# Altium PCB Driver Morpheus PONTE H.PcbDoc
Units mm, origin at the board's own origin, x right, y up, seen from the top; angles counter-clockwise.
Board outline 48.5 x 25 mm, 2 copper layers (Top Layer, Bottom Layer); 40 components, 20 nets, 111 pads, 8 vias.
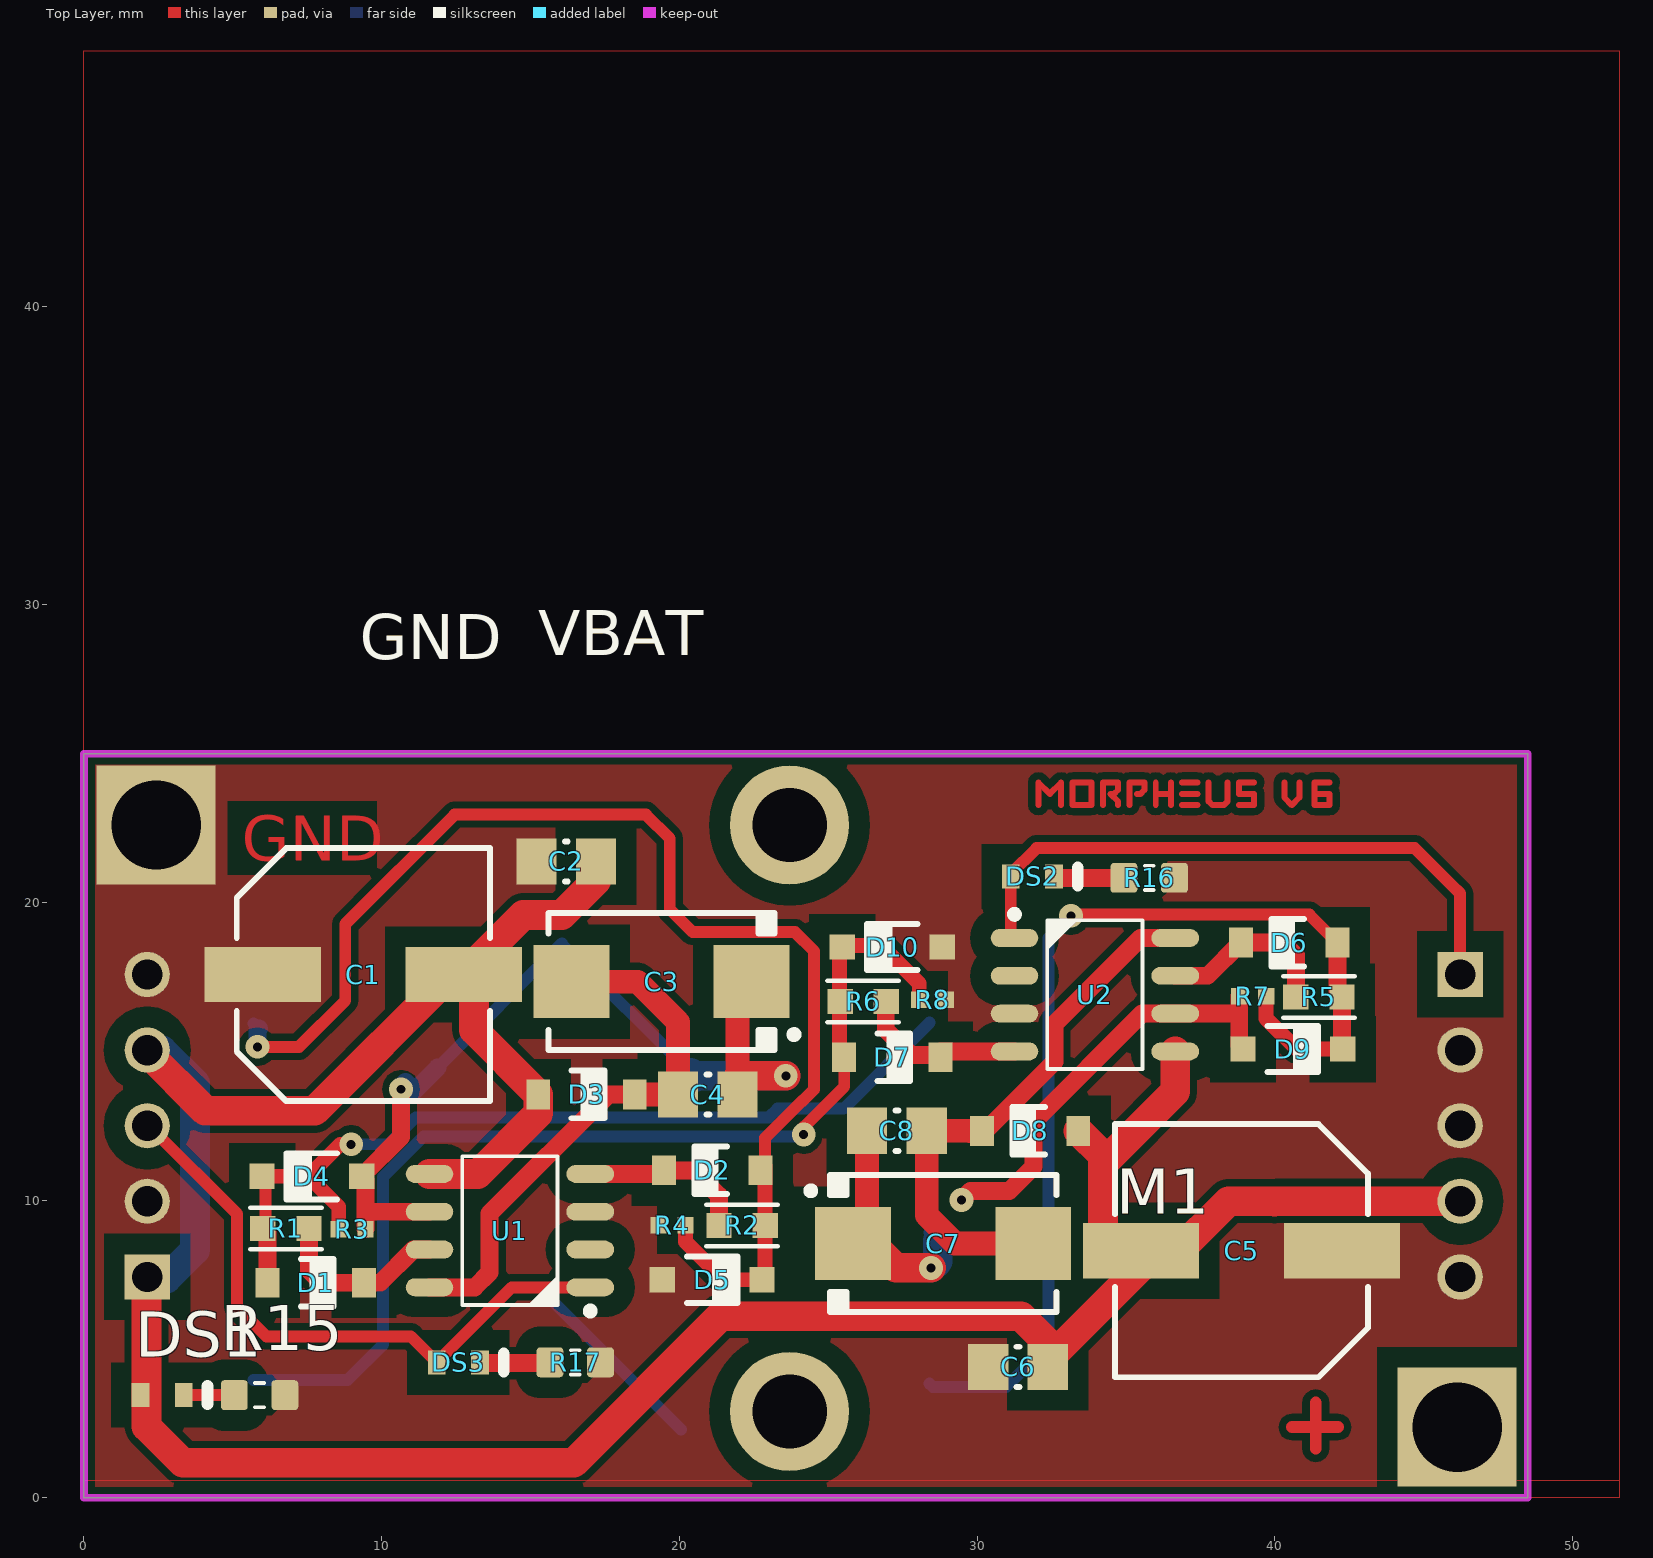
[diagram p0: Top Layer view]
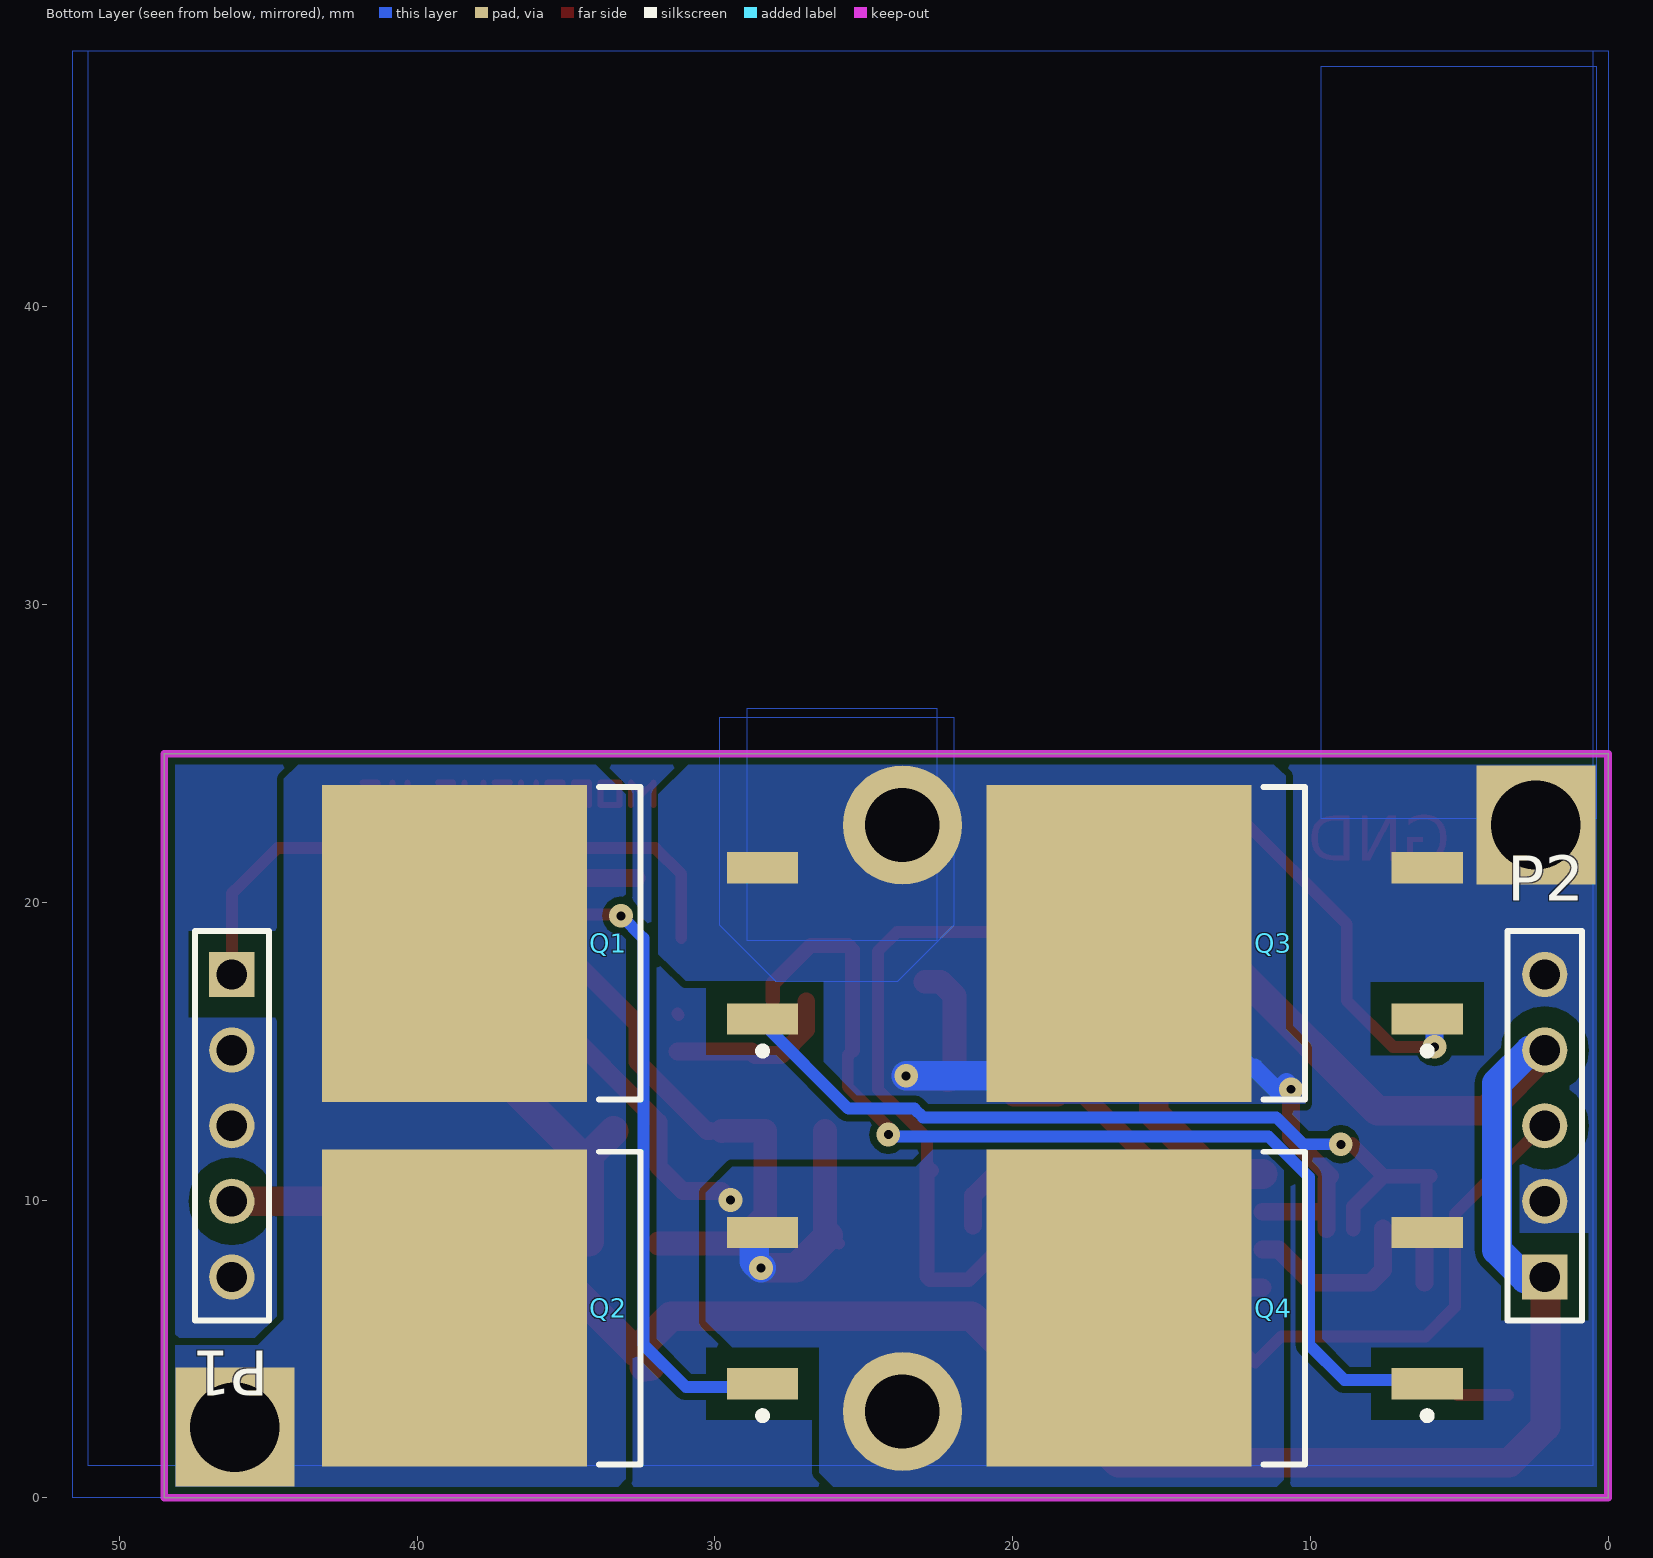
[diagram p1: Bottom Layer view, seen from below]

## Layer stack, top to bottom
Top Solder: solder mask 0.0102, Solder Resist, Dk 3.5
Top Layer: signal copper 0.0356
Dielectric 1: dielectric 0.32, FR-4, Dk 4.8
Bottom Layer: signal copper 0.0356
Bottom Solder: solder mask 0.0102, Solder Resist, Dk 3.5

## Board outline
0,0 0,25 48.5,25 48.5,0

## Design rules (kind name [scope] priority, off if disabled: settings)
BoardOutlineClearance [All] p1: gap=0 ignorepadtopadclearanceinfootprint=FALSE
Clearance Clearance_1 [IsPad vs InPolygon] p1: gap=0.7 ignorepadtopadclearanceinfootprint=FALSE
Clearance [All] p2: gap=0.24 ignorepadtopadclearanceinfootprint=FALSE except(0: Arc-Hole Track-Hole SMDPad-Hole THPad-Hole Via-Hole Fill-Hole Poly-Hole Region-Hole Text-Hole; 0.7: Track-Region)
ComponentClearance [All vs InComponentClass('IGNORA')] p1: gap=-1 collisioncheckmode=3 verticalgap=-1 showdistances=FALSE
ComponentClearance ComponentClearance_1 [All] p2: gap=0.254 collisioncheckmode=3 verticalgap=0.254 showdistances=FALSE
PlaneConnect [All] p1: planeconnectstyle=Direct reliefexpansion=0.508 reliefentries=4 reliefconductorwidth=0.254 reliefairgap=0.254
PolygonConnect [All] p1: connectstyle=Direct reliefconductorwidth=0.254 reliefentries=4 polygonreliefangle="90 Angle" airgapwidth=0.254
RoutingVias [All] p1: holewidth=0.3 width=0.4 viastyle="Through Hole" minholewidth=0.3 minwidth=0.4 maxholewidth=0.4 maxwidth=0.6
SMDNeckDown [InNet('No Net')] p1: percent=70.000
SolderMaskExpansion [All] p1: expansion=0.102
Width [All] p1: maxlimit=15 minlimit=0.01 preferedwidth=0.4
28 further rules are at their usual default settings.

## Components (designator, comment, footprint, x,y, rotation, side; value= is the part's Value field where it differs from the comment)
C1 "100uF 25v" CAPAE9083X70M 9.381,17.575 r0 top
C2 "CAP 100nF 25V 0805(2012)" CAPC0805(2012)145_M#1 16.2,21.375 r0 top value=100nF
C3 "Cap_10u_35v" "CAP POL 2917/7343" 19.401,17.337 r180 top
C4 "CAP 100nF 25V 0805(2012)" CAPC0805(2012)145_M#2 196.597,-60.497 r180 top value=100nF
C5 "100uF 25v" CAPAE9083X70M 38.881,8.3 r180 top
C6 "CAP 100nF 25V 0805(2012)" CAPC0805(2012)145_M#1 31.375,4.4 r0 top value=100nF
C7 "Cap_10u_35v" "CAP POL 2917/7343" 28.861,8.538 r0 top
C8 "CAP 100nF 25V 0805(2012)" CAPC0805(2012)145_M#2 -148.335,86.372 r0 top value=100nF
D1 "1N4148W" JSCJ-SOD-123-2_V 7.781,7.225 r0 top
D2 "1N4148W" JSCJ-SOD-123-2_V 21.106,11 r180 top
D3 "1N4148W" JSCJ-SOD-123-2_V 16.881,13.55 r0 top
D4 "MMSZ5246B-E3-08" VISH-SOD-123-2_V 7.656,10.8 r180 top
D5 "MMSZ5246B-E3-08" VISH-SOD-123-2_V 21.1,7.325 r0 top
D6 "1N4148W" JSCJ-SOD-123-2_V 40.481,18.65 r180 top
D7 "1N4148W" JSCJ-SOD-123-2_V 27.15,14.8 r0 top
D8 "1N4148W" JSCJ-SOD-123-2_V 31.78,12.325 r180 top
D9 "MMSZ5246B-E3-08" VISH-SOD-123-2_V 40.606,15.075 r0 top
D10 "MMSZ5246B-E3-08" VISH-SOD-123-2_V 27.15,18.5 r180 top
DS1 "TLMB1100-GS08" VISH-TLMX1100-2_V 2.625,3.45 r0 top
DS2 "TLMB1100-GS08" VISH-TLMX1100-2_V 31.856,20.875 r0 top
DS3 "TLMB1100-GS08" VISH-TLMX1100-2_V 12.575,4.55 r0 top
P1 "MTLW-105-05-G-S-190" SMTC-MTLW-105-05-X-S-190 46.225,17.58 r270 bottom
P2 "MTLW-105-05-G-S-190" SMTC-MTLW-105-05-X-S-190 2.125,7.42 r90 bottom
Q1 "IRF3205S" D2PAK_N 35.2,18.625 r0 bottom
Q2 "IRF3205S" D2PAK_N 35.2,6.375 r0 bottom
Q3 "IRF3205S" D2PAK_N 12.875,18.625 r0 bottom
Q4 "IRF3205S" D2PAK_N 12.875,6.375 r0 bottom
R1 "22" SMD-0603-RES 6.781,9.05 r270 top
R2 "22" SMD-0603-RES 22.106,9.15 r90 top
R3 "RC0402JR-071KL" RES-0402 9.006,9.025 r180 top value=1K
R4 "RC0402JR-071KL" RES-0402 19.756,9.15 r0 top value=1K
R5 "22" SMD-0603-RES 41.481,16.825 r270 top
R6 "22" SMD-0603-RES 26.175,16.675 r90 top
R7 "RC0402JR-071KL" RES-0402 39.256,16.85 r0 top value=1K
R8 "RC0402JR-071KL" RES-0402 28.506,16.725 r180 top value=1K
R15 "Thick Film" RESC1608X55N 5.9,3.45 r0 top value=1k
R16 "Thick Film" RESC1608X55N 35.781,20.825 r0 top value=220R
R17 "Thick Film" RESC1608X55N 16.5,4.55 r0 top value=220R
U1 "IR2184" SOIC127P600X175-8AN 14.306,8.975 r180 top
U2 "IR2184" SOIC127P600X175-8AN 33.956,16.9 r0 top

## Footprints (in the part's own frame and the unit in brackets; to place one, negate y for a bottom-side part, rotate by r counter-clockwise, add the part's x,y. Pads: shape width x height; smd on the part's side, far side on the other; paste and mask are expansions set on the pad)
"CAP POL 2917/7343" [mm] "Molded Capacitor, 2-Leads, Body 7.30x4.30mm, IPC Medium Density"
  rect 2.55x2.45 smd: 1(-3.025,0) 2(3.025,0)
  silkscreen extent -4.58,-2.3 3.8,2.3, body extent -3.65,-2.15 3.65,2.15, height 4.1
CAPAE9083X70M [mm] "Aluminum Electrolytic Capacitor, Body 8,30x8,30x7,00mm, IPC Low Density"
  rect 3.9x1.85 smd: 1(-3.375,0) 2(3.375,0)
  silkscreen extent -4.25,-4.25 4.25,4.25, body extent -4.25,-4.25 4.25,4.25, height 7
CAPC0805(2012)145_M#1 [mm] "Chip Capacitor, Body 2.0x1.2mm, Height 1.45mm, IPC Low Density"
  rect 1.35x1.55 smd: 1(-1,0) 2(1,0)
  silkscreen extent -0.05,-0.67 0.05,0.67, body extent -1.1,-0.72 1.1,0.72, height 1.45
CAPC0805(2012)145_M#2 [mm] "Chip Capacitor, Body 2.0x1.2mm, Height 1.45mm, IPC Low Density"
  rect 1.35x1.55 smd: 1(174.641,-74.041) 2(176.641,-74.041)
  silkscreen extent 175.59,-74.72 175.69,-73.37, body extent 174.54,-74.77 176.74,-73.32, height 1.45
D2PAK_N [mm] "D-PAK/TO-263-3; 3 Leads (1 Cropped); Body 14.7 (inc. leads) x 10.2 mm (LxW max)"
  rect 2.4x1.05 smd: 1(-6.8,2.54) 3(-6.8,-2.54)
  rect 8.9x10.65 smd: 2(3.55,0)
  silkscreen extent -6.92,-5.25 -1.3,5.25, body extent -2.7,-5.28 6.3,5.28, height 4.69
JSCJ-SOD-123-2_V [mm] "SMD, 2-Leads, Body 2.7x1.6mm, Height 1.25mm"
  rect 0.8x1 smd: 1(-1.62,0) 2(1.62,0)
  silkscreen extent -0.5,-0.8 0.6,0.8, body extent -1.35,-0.8 1.35,0.8, height 1.25
RES-0402 [mm]
  rect 0.55x0.55 smd: 1(-0.45,0) 2(0.45,0)
  body extent -0.53,-0.27 0.53,0.28, height 0.4
RESC1608X55N [mm] "Chip Resistor, Body 1.6x0.8mm, EIA 0603, IPC Medium Density"
  round 0.254 on Mech15: 0(0,0)
  rrect25% 0.9x1 smd: 1(-0.85,0) 2(0.85,0)
  Top Layer pour cut-out: -0.6,0.5 -0.4,0.7 0.4,0.7 0.6,0.5 0.6,-0.5 0.4,-0.7 -0.4,-0.7 -0.6,-0.5
  silkscreen extent -0.15,-0.41 0.15,0.41, body extent -0.87,-0.47 0.88,0.48, height 0.54
SMD-0603-RES [mm]
  rect 0.85x0.85 smd: 1(0,0.775) 2(0,-0.775)
  silkscreen extent -0.7,-1.2 0.7,1.2, body extent -0.4,-0.85 0.4,0.85, height 0.56
SMTC-MTLW-105-05-X-S-190 [mm] "Terminal Assembly, 1x5 Pins, Vertical, 2.54mm Pitch, Male"
  rect 1.52x1.52 hole 1.02: 1(0,0)
  round 1.52 hole 1.02: 2(2.54,0) 3(5.08,0) 4(7.62,0) 5(10.16,0)
  silkscreen extent -1.46,-1.24 11.62,1.24, body extent -1.27,-1.24 11.43,1.24, height 6.35
SOIC127P600X175-8AN [mm] "SOIC, 8-Leads, Body 4.9x3.9mm, Pitch 1.27mm, IPC Medium Density"
  round 1 on Mech15: 0(0,0)
  oval 1.6x0.6 smd: 1(-2.7,1.905) 2(-2.7,0.635) 3(-2.7,-0.635) 4(-2.7,-1.905) 5(2.7,-1.905) 6(2.7,-0.635) 7(2.7,0.635) 8(2.7,1.905)
  silkscreen extent -2.83,-2.5 1.6,2.82, body extent -3,-2.45 3,2.45, height 1.75
VISH-SOD-123-2_V [mm] "SMD, 2-Leads, Body 2.7x1.55mm, Height 1.35mm"
  rect 0.85x0.85 smd: 1(-1.675,0) 2(1.675,0)
  silkscreen extent -0.85,-0.78 0.85,0.78, body extent -1.35,-0.77 1.35,0.77, height 1.35
VISH-TLMX1100-2_V [mm] "SMD, 2-Leads, Body 1.6x0.8mm"
  rect 0.6x0.8 smd: 1(-0.725,0) 2(0.725,0)
  silkscreen extent 1.53,-0.3 1.53,0.3, body extent -0.8,-0.4 0.8,0.4, height 0.65

## Part data
C1: library part Cap_10u_35v
C2 C4 C6 C8: library part CMP-1036-04408-1, "CAP 100nF 25V ±5% 0805 (2012 Metric) Thickness 1.45mm SMD", Case-EIA=0805, Case-Metric=2012, Rated Voltage="25 V", Tolerance=±5%, Max Thickness="1.45 mm", Technology=SMT
C5: library part Cap_100u_25v, "Cap Tântalo"
D1 D2 D3 D6 D7 D8: library part CMP-0914-00001-1, "Fast Switching Diode, 75 V, 150 mA, 2-Pin 2.7 x 1.6 x 1.25 mm SMD, Tape and Reel", Manufacturer="Changjiang Electronics", ComponentLink1Description="Manufacturer URL", ComponentLink1URL=http://www.cj-elec.com/, ComponentLink2Description=Datasheet, ComponentLink2URL=http://www.cj-elec.com/txUpfile/20121613352740313.pdf, ComponentLink3Description="Package Specification", ComponentLink3URL=http://www.cj-elec.com/txUpfile/201412112231195145.pdf, DatasheetVersion="Rev. A", IO (mA)=150, IR (uA)=1, Mounting Technology="Surface Mount", PackageDescription="2-Pin SMD, Body 2.7 x 1.6 mm, Height 1.25 mm", PackageReference=SOD-123-2, PackageVersion="Rev. A", Packing="Tape and Reel", PartNumber=1N4148W, PD (mW)=350, Trr (ns)=4, TSTG (degC)="-55 to 150", VF (V)=1.25, VR (V)=75
D4 D5 D9 D10: library part CMP-0931-00032-1, "Small Signal Zener Diode, 16 V +/- 5%, -55 to 155 degC, 2-Pin SOD-123, RoHS, Tape and Reel", Manufacturer="Vishay Semiconductor", Operating Temperature="-55 to 150 degC", Power Dissipation (mW)=500, Test Current (IZT1) (mA)=7.8, Tolerance="+/- 5%", Zener Voltage (NOM.) (V)=16, ComponentLink1Description="Manufacturer URL", ComponentLink1URL=http://www.vishay.com/, ComponentLink2Description=Datasheet, ComponentLink2URL=http://www.vishay.com/docs/85774/mmsz5225.pdf, ComponentLink3Description="Package Specification", ComponentLink3URL=http://www.vishay.com/docs/85774/mmsz5225.pdf, DatasheetVersion="Rev. 1.9", Int. Construction=Single, Mounting Technology="Surface Mount", PackageDescription="2-Pin SMD, Body 2.7 x 1.55 mm, Height 1.35 mm", PackageReference=SOD-123-2, PackageVersion="Rev. 1.9", Packing="Tape and Reel", PartNumber=MMSZ5246B-E3-08, RoHS=TRUE, Zener Impedance (IZT1) (Max.) (Ohm)=17
DS1 DS2 DS3: library part CMP-1666-00028-1, "Blue LED, 10 mA, 3.9 V, -40 to 100 degC, 2-Pin SMD (0603), RoHS, Tape and Reel", Capacitance="10 nF", Case\Package=Radial, Max Operating Temperature="125 degC", Min Operating Temperature="-55 degC", Package Quantity=500, Tolerance=10%, Type (Capacitors)=X7R, Voltage Rating="100 V", ComponentLink1Description="Manufacturer URL", ComponentLink1URL=http://www.vishay.com/, ComponentLink2Description=Datasheet, ComponentLink2URL=http://download.siliconexpert.com/pdfs/2016/8/7/12/43/26/667/vsh_/manual/379263299541529tlmb1100.pdf, DatasheetVersion="Rev. 2.7, 03/2016", Height="2.54 mm", Lead Pitch="2.54 mm", Length="5.33 mm", Mount="Through Hole", PackageDescription="2-Pin Surface Mount Device, Body 1.6 x 0.8 mm", PackageReference=0603, Packaging=Bulk, Pins=2, Radiation Hardening=No, REACH SVHC="No SVHC", RoHSCompliant=true, Width="3.81 mm"
P1 P2: library part CMP-1024-00076-1, Manufacturer=Samtec, Temperature Range="-55 to 125 degC", ComponentLink1Description="Manufacturer URL", ComponentLink1URL=http://www.samtec.com, ComponentLink2Description=Datasheet, ComponentLink2URL=http://www.samtec.com/documents/webfiles/pdf/MTLW_TH.PDF, ComponentLink3Description="Package Specification", ComponentLink3URL=http://www.samtec.com/documents/webfiles/cpdf/MTLW-1XX-XX-XX-X-XXX-XX-XX-MKT1.pdf, DatasheetVersion=F-214, Mounting Technology=Through-hole, Orientation=Vertical, PackageDescription="Low Profile Terminal Assembly", PackageReference=MTLW-105-05-X-S-190, PackageVersion="T, 6/1991", PartNumber=MTLW-105-05-G-S-190, Pitch="2.54 mm", RoHS=True
Q1 Q2 Q3 Q4: "HEXFET Power MOSFET", ComponentLink1Description="Manufacturer Link", ComponentLink1URL=http://www.irf.com/, ComponentLink2Description=Datasheet, ComponentLink2URL=http://www.irf.com/product-info/datasheets/data/irf3205s.pdf, DatasheetVersion=Aug-1997, LatestRevisionDate=20-Nov-2009, LatestRevisionNote="IPC-7351 Footprint Added.", PackageDescription="3-Pin Transistor Outline Package 2.54 mm Pitch, 15.1 mm Lead Span", PackageReference=D2PAK, Published=8-Jun-2000, Publisher="Altium Limited"
R1 R2 R5 R6: library part ERJ-3EKF22R0V, "RES SMD 22 OHM 1% 1/10W 0603", Digi-Key Part Number=P22.0HCT-ND, Manufacturer="Panasonic Electronic Components", Operating Temperature="-55°C ~ 155°C", Package / Case="0603 (1608 Metric)", Power (Watts)="0.1W, 1/10W", Supplier Device Package=0603, Temperature Coefficient=±100ppm/°C, Tolerance=±1%, @ qty=1500, Composition="Thick Film", Datasheets=http://industrial.panasonic.com/www-cgi/jvcr13pz.cgi?E+PZ+3+AOA0002+ERJ3EKF22R0V+7+WW, Factory Stock=0, Failure Rate=-, Features="Automotive AEC-Q200", Height - Seated (Max)="0.022\" (0.55mm)", Image=//media.digikey.com/Photos/Panasonic%20Photos/MFG_ERJ-P6W%20Series.jpg, Minimum Quantity=1, Number of Terminations=2, Packaging="Cut Tape (CT)", Part Number=ERJ-3EKF22R0V, Part Status=Active, Quantity Available=100321, Series=ERJ, Size / Dimension="0.063\" L x 0.031\" W (1.60mm x 0.80mm)", Unit Price (USD)=0.00379
R3 R4 R7 R8: library part "RES 1K 0402", "RES SMD 1K OHM 5% 1/16W 0402"
R15 R16 R17: library part RES_220R_0603_5%, "Resistor SMD chip 220 Ohm 0.1W 5% 0603", Manufacturer 1=Yageo, Manufacturer 2="Panasonic Electronic Components", Manufacturer 3="Stackpole Electronics Inc", Manufacturer 4="Rohm Semiconductor", Manufacturer 5="Royal Ohm", Manufacturer Part Number 1=RC0603JR-07220RL, Manufacturer Part Number 2=ERJ-3GEYJ221V, Manufacturer Part Number 3=RMCF0603JT220R, Manufacturer Part Number 4=MCR03ERTJ221, Manufacturer Part Number 5=0603WAJ0221, Package / Case="0603 (1608 metric)", Ratings="1/10 W", Supplier Part Number 1=311-220GRCT-ND, Tolerance=±5%, ComponentLink1Description=http://www.yageo.com/documents/recent/PYu-RC0603_51_RoHS_L_4.pdf, ComponentLink1URL=http://www.yageo.com/documents/recent/PYu-RC0603_51_RoHS_L_4.pdf, ComponentLink2Description=http://industrial.panasonic.com/www-cgi/jvcr13pz.cgi?E+PZ+3+AOA0001+ERJ3GEYJ221V+7+WW, ComponentLink2URL=http://industrial.panasonic.com/www-cgi/jvcr13pz.cgi?E+PZ+3+AOA0001+ERJ3GEYJ221V+7+WW, ComponentLink3Description=http://www.seielect.com/Catalog/SEI-RMCF_RMCP.pdf, ComponentLink3URL=http://www.seielect.com/Catalog/SEI-RMCF_RMCP.pdf, ComponentLink4Description=http://rohmfs.rohm.com/en/products/databook/datasheet/passive/resistor/chip_resistor/mcr_g.pdf, ComponentLink4URL=http://rohmfs.rohm.com/en/products/databook/datasheet/passive/resistor/chip_resistor/mcr_g.pdf, Material="Thick Film", RoHS 1="RoHS Compliant", RoHS 2="RoHS Compliant", RoHS 3="RoHS Compliant", RoHS 4="RoHS Compliant", SCDType=spec, Supplier 1=Digi-Key, Supplier 2=Digi-Key, Supplier 3=Digi-Key, Supplier 4=Digi-Key, Supplier Part Number 2=P220GCT-ND, Supplier Part Number 3=RMCF0603JT220RCT-ND, Supplier Part Number 4=RHM220CGCT-ND
U1 U2: PSpiceTemplate="X^@REFDES %VCC %IN %SD %COM %VB %HO %VS %LO @MODEL PARAMS:  ?CDELAY|CDELAY=@CDELAY||CDELAY=50N| ?RDELAY|RDELAY=@RDELAY||RDELAY=50| ?T1|T1=@T1||T1=-40| ?T2|T2=@T2||T2=25| ?T3|T3=@T3||T3=125| ?V1|V1=@V1||V1=10| ?V2|V2=@V2||V2=15| ?V3|V3=@V3||V3=20| ?TOFFT1|TOFFT1=@TOFFT1||TOFFT1=270N| ?TOFFT2|TOFFT2=@TOFFT2||TOFFT2=270N| ?TOFFT3|TOFFT3=@TOFFT3||TOFFT3=270N| ?TOFFV1|TOFFV1=@TOFFV1||TOFFV1=270N| ?TOFFV2|TOFFV2=@TOFFV2||TOFFV2=270N| ?TOFFV3|TOFFV3=@TOFFV3||TOFFV3=270N| ?TONT1|TONT1=@TONT1||TONT1=210N| ?TONT2|TONT2=@TONT2||TONT2=210N| ?TONT3|TONT3=@TONT3||TONT3=210N| ?TONV1|TONV1=@TONV1||TONV1=210N| ?TONV2|TONV2=@TONV2||TONV2=210N| ?TONV3|TONV3=@TONV3||TONV3=210N|", CDELAY=50N, RDELAY=50, T1=-40, T2=25, T3=125, TOFFT1=270N, TOFFT2=270N, TOFFT3=270N, TOFFV1=270N, TOFFV2=270N, TOFFV3=270N, TONT1=210N, TONT2=210N, TONT3=210N, TONV1=210N, TONV2=210N, TONV3=210N, V1=10, V2=15, V3=20

## Free pads (board coordinates)
  rect 4x4 hole 3: 8(2.425,22.6) 8(46.125,2.375)
  round 4 hole 2.5: 8(23.7,2.9) 8(23.7,22.6)

## Via types
v1: diameter 0.8, hole 0.3, Top Layer to Bottom Layer, 8 vias

## Nets (pads, with @x,y where several pads share a name; then routed paths per layer and width w, separated by ;. In a path a pad name is that pad's centre, name@x,y a point inside that pad or via, vN(x,y) a via of type N, cw(c..) or ccw(c..) an arc to the next point about the centre after c; other vN are vias at no path point)
+12V: C1.2 C2.2 C5.2 C6.2 D3.1 D8.1 DS1.1 P1.4 P2.1 P2.4 U1.5 U2.5 | length 105.4
  Top Layer w0.4: C2.2@17.2,20.725 C2.2 ; C5.2 35.656,8.15 C5.2@36.625,8.15
  Top Layer w1: P2.1@1.9,7.42 2.1,7.22 2.1,2.4 3.325,1.175 16.45,1.175 21.375,6.1 31.475,6.1 32.663,4.912 35.506,7.756 C5.2 ; P2.4@2.08,14.995 4.075,13 7.75,13 12.325,17.575 C1.2 ; U1.5 13.23,10.88 15.261,12.911 D3.1 13.1,15.711 13.1,17.067 12.674,17.493 C1.2 ; C1.2@14.05,17.575 C1.2 ; C2.2@17.2,20.725 16.05,19.575 14.756,19.575 C1.2 ; C6.2@32.175,4.425 32.262,4.512 C6.2 ; D8.1 34.225,11.5 34.225,11.22 ; C5.2@34.225,8.6 34.225,11.22 ; C5.2@36.625,8.15 38.44,9.965 39.999,9.965 ; U2.5 36.656,13.651 34.225,11.22 ; 39.989,9.955 39.999,9.965 ; P1.4 46.22,9.965 39.999,9.965
  Bottom Layer w1: P2.4@1.9,15.03 2.62,15.03 3.725,13.925 3.725,8.325 2.767,7.367 P2.1@1.943,7.367
"BAT 5S": pad.8@46.125,2.375 Q1.2 Q2.2
GND: C1.1 C2.1 C5.1 C6.1 D5.1 D10.1 P1.2 P1.3 P1.5 P2.2 P2.5 pad.8@2.425,22.6 Q3.3 Q4.3 R4.1 R8.1 R15.2 R16.2 R17.2 U1.3 U2.3 | length 0.1
  Top Layer w0.4: U1.3 U1.3@17.046,9.65 ; U2.3@31.216,16.225 U2.3
IN_1: DS3.1 P2.3 U1.1 | length 21.1
  Top Layer w0.4: P2.3@2.007,12.383 2.292,12.383 5.141,9.534 5.141,6.409 6.125,5.425 10.975,5.425 DS3.1 14.37,7.07 U1.1
IN_2: DS2.1 P1.1 U2.1 | length 21
  Top Layer w0.4: U2.1@31.131,18.805 DS2.1 31.131,20.956 32,21.825 44.7,21.825 46.147,20.378 46.225,20.3 P1.1
NetC3_1: C3.1 C4.1 D4.1 pad.8@23.7,22.6 Q1.3 Q3.2 R3.1 U1.6 | length 30.2
  Top Layer w0.4: D4.1@9.275,10.744 D4.1 D4.1@9.456,10.675 ; 21.956,14.35 C4.1@22.031,14.275
  Top Layer w0.6: D4.1 10.65,12.119 v1(10.65,13.725) ; R3.1 D4.1@9.456,10.675 ; 9.471,9.61 U1.6
  Top Layer w0.8: 21.956,14.35 21.956,16.867 C3.1 C3.1@22.933,17.337
  Top Layer w1: C4.1@22.031,14.275 22.181,14.125 22.231,14.175 v1(23.575,14.175)
  Bottom Layer w0.4: 11.875,14.45 Q3.2@16.05,18.625 ; Q3.2@16.05,18.6 Q3.2@20.375,14.275
  Bottom Layer w0.6: v1(10.65,13.725) 10.55,13.725 10.8,13.975 11.1,13.675 11.875,14.45
  Bottom Layer w1: Q3.2@20.375,14.275 20.525,14.125 20.575,14.175 v1(23.575,14.175)
NetC3_2: C3.2 C4.2 D3.2 U1.8 | length 18.8
  Top Layer w0.6: U1.8 13.126,7.07 13.625,7.569 13.625,9.55 17.625,13.55 D3.2
  Top Layer w0.8: C3.2 18.594,17.337 19.956,15.975 C4.2 ; D3.2 C4.2@19.95,13.55
NetC7_1: C7.1 C8.1 D9.1 pad.8@23.7,2.9 Q2.3 Q4.2 R7.1 U2.6 | length 28.9
  Top Layer w0.4: C7.1 26.098,8.8 C7.1@26.2,8.8 ; D9.1@38.806,14.894 D9.1@38.806,15.2
  Top Layer w0.6: C8.1@26.301,12.336 C8.1 ; v1(29.475,10) 29.778,10.303 31.078,10.303 31.9,11.125 31.9,12.625 35.54,16.265 U2.6 38.791,16.265 ; D9.1@38.806,15.2 R7.1
  Top Layer w0.8: C7.1@26.098,8.8 26.306,9.008 C8.1
  Top Layer w1: C7.1@26.2,8.8 27.275,7.725 v1(28.45,7.725)
  Bottom Layer w0.4: Q4.2@15.85,6.5 Q4.2@20.05,2.3 ; Q2.3 Q2.3@28.675,8.64
  Bottom Layer w1: v1(28.45,7.725) 28.675,7.95 Q2.3@28.675,8.64
NetC7_2: C7.2 C8.2 D8.2 U2.8 | length 18.2
  Top Layer w0.6: D8.2 30.274,12.325 32.596,14.647 32.596,15.917 35.484,18.805 U2.8
  Top Layer w0.8: D8.2@29.761,12.325 C8.2 28.306,9.494 29.262,8.538 C7.2
NetD1_1: D1.1 D4.2 Q1.1 R1.2 R3.2 | length 30.4
  Top Layer w0.4: R1.2 6.1,9.144 D4.2@6.1,10.8
  Top Layer w0.5: D4.2 6.1,10.8 7.531,10.8 ; R3.2 8.556,9.775 7.531,10.8 ; v1(8.975,11.876) 8.607,11.876 7.531,10.8
  Top Layer w0.6: R1.2 6.161,8.895 D1.1
  Bottom Layer w0.4: v1(8.975,11.876) 10.238,11.876 11.143,12.78 23.005,12.78 23.3,13.075 25.515,13.075 Q1.1@28.4,15.96
NetD1_2: D1.2 R1.1 U1.7 | length 6.1
  Top Layer w0.6: R1.1 7.556,7.65 7.981,7.225 D1.2 9.95,7.225 11.065,8.34 U1.7
NetD2_1: D2.1 D5.2 Q3.1 R2.2 R4.2 | length 43.5
  Top Layer w0.4: v1(5.825,15.15) 7.222,15.15 8.775,16.703 8.775,19.275 12.45,22.95 18.875,22.95 19.675,22.15 19.675,19.775 20.448,19.002 23.883,19.002 24.525,18.36 24.525,13.721 24.139,13.335 24.122,13.335 22.881,12.094 22.881,11.155 D2.1
  Top Layer w0.5: R4.2 20.206,8.6 21.481,7.325 22.781,7.325 22.881,7.425 R2.2 D2.1@22.881,10.845 ; D2.1 D2.1@22.881,10.845 ; D2.1@22.881,11.155 D2.1@22.881,10.845
  Bottom Layer w0.4: Q3.1@5.7,15.935 Q3.1@5.875,15.76
  Bottom Layer w0.6: v1(5.825,15.15) 5.825,15.71 Q3.1@5.875,15.76
NetD2_2: D2.2 R2.1 U1.4 | length 5.7
  Top Layer w0.6: U1.4 19.366,10.88 D2.2 20.481,11 21.331,10.15 R2.1
NetD6_1: D6.1 D9.2 Q2.1 R5.1 R7.2 | length 36.2
  Top Layer w0.4: v1(33.15,19.55) 33.19,19.59 41.161,19.59 D6.1 ; D9.2 D9.2@42.381,14.975
  Top Layer w0.5: R7.2 39.706,16.1 40.731,15.075 D9.2
  Top Layer w0.6: D6.1 42.101,16.98 R5.1 D9.2@42.256,15.1
  Bottom Layer w0.4: Q2.1 28.51,3.725 30.975,3.725 32.4,5.15 32.4,18.8 v1(33.15,19.55)
NetD6_2: D6.2 R5.2 U2.7 | length 6.1
  Top Layer w0.6: U2.7 37.746,17.535 D6.2 40.281,18.65 40.706,18.225 R5.2
NetD7_1: D7.1 D10.2 Q4.1 R6.1 R8.2 | length 35.6
  Top Layer w0.4: v1(24.175,12.2) 24.175,12.45 25.536,13.811 25.536,14.794 D7.1 25.53,14.881 D7.1@25.381,15.03
  Top Layer w0.5: D7.1@25.381,15.03 25.381,18.4 25.531,18.55 26.781,18.55 28.056,17.275 R8.2
  Bottom Layer w0.4: Q4.1@5.7,3.96 8.86,3.96 10.05,5.15 10.05,10.782 11.408,12.14 23.885,12.14 v1@23.94,12.195
NetD7_2: D7.2 R6.2 U2.4 | length 5.7
  Top Layer w0.6: R6.2@26.931,16.675 26.931,15.725 27.781,14.875 28.65,14.875 28.77,14.995 U2.4
NetDS1_2: DS1.2 R15.1 | length 1.7
  Top Layer w0.4: DS1.2 R15.1
NetDS2_2: DS2.2 R16.1 | length 2.3
  Top Layer w0.6: DS2.2@32.631,20.825 R16.1
NetDS3_2: DS3.2 R17.1 | length 2.4
  Top Layer w0.6: DS3.2@13.3,4.525 R17.1@15.65,4.525
pads on no net: R15.0 R16.0 R17.0 U1.0 U1.2 U2.0 U2.2
copper on no net: | length 24.8
  Top Layer w0.2: 32.063,23.268 32.063,23.395 32.063,24.03 32.444,23.649 32.825,24.03 32.825,23.268 ; 33.206,23.268 33.206,24.03 33.841,24.03 33.841,23.268 33.219,23.268 ; 34.222,23.268 34.222,24.03 34.73,24.03 34.73,23.776 34.603,23.649 34.476,23.649 34.73,23.395 34.73,23.268 ; 35.111,23.268 35.111,24.03 35.619,24.03 35.619,23.776 35.492,23.649 35.365,23.649 ; 36,23.268 36,23.649 36,24.03 ; 36.127,23.649 36.508,23.649 ; 36.508,23.268 36.508,24.03 ; 36.889,23.268 37.397,23.268 ; 36.889,23.649 37.397,23.649 ; 36.889,24.03 37.397,24.03 ; 37.778,24.03 37.778,23.395 37.905,23.268 38.286,23.268 38.413,23.395 38.413,24.03 ; 38.794,23.268 39.302,23.268 39.302,23.649 38.794,23.649 38.794,24.03 39.302,24.03 ; 40.318,24.03 40.318,23.522 40.572,23.268 40.826,23.522 40.826,24.03 ; 41.334,23.649 41.842,23.649 41.842,23.268 41.334,23.268 41.334,24.03 41.842,24.03
  Top Layer w0.4: 40.575,2.375 42.125,2.375 ; 41.375,1.65 41.375,2.375 41.375,3.2

## Polygon pours and split planes (outlines as drawn)
GND on Bottom Layer "Bottom Layer-GND" (solid, pour order 114): 0,25 0,0 48.5,0 48.5,25
NetC3_1 on Bottom Layer "Bottom Layer-NetC3_1" (solid, pour order 92): 10.175,15.1 10.825,15.75 10.825,24.175 10.825,24.25 11.225,24.626 30.9,24.625 31.9,23.625 31.9,18.267 30.978,17.361 26.35,17.361 26.35,14.641 24.952,13.244 10.175,13.244
"BAT 5S" on Bottom Layer "Bottom Layer-BAT 5S" (solid, pour order 112): 33,0.625 33.025,0.6 33.25,0.375 48.125,0.375 48.125,5.125 45.35,5.125 44.475,6 44.475,24.15 44,24.625 34,24.625 33,23.625
no net on Bottom Layer "Bottom Layer-No Net 1" (solid, pour order 110): 33.625,24.675
no net on Bottom Layer "Bottom Layer-No Net 2" (solid, pour order 108): 33.625,24.675
no net on Bottom Layer "Bottom Layer-No Net 3" (solid, pour order 106): 33.625,24.675
no net on Bottom Layer "Bottom Layer-No Net 5" (solid, pour order 104): 33.85,24.65
NetC7_1 on Bottom Layer "Bottom Layer-NetC7_1" (solid, pour order 98): 26.5,5.06 26.5,4.9 26.5,0.85 26.025,0.375 11.125,0.374 10.9,0.599 10.9,0.625 10.9,11 11.65,11.75 22.625,11.75 23.25,11.125 29.425,11.125 30.3,10.25 30.3,5.925 29.425,5.06
no net on Bottom Layer "Bottom Layer-No Net 6" (solid, pour order 96): 10.499,10.596
no net on Bottom Layer "Bottom Layer-No Net 4" (solid, pour order 86): 53.15,13.95
NetC3_1 on Bottom Layer "Bottom Layer-No Net" (solid, shelved, pour order 34): 0.374,48.075 9.656,48.075 9.656,22.825 0.374,22.825
"BAT 5S" on Bottom Layer "NONET_L02_P042" (solid, shelved, pour order 42): 22.531,26.5 28.931,26.5 28.931,18.725 22.531,18.725
GND on Bottom Layer "GND" (solid, remove dead copper, shelved, pour order 50): 0,0 51.562,0 51.562,48.6 0,48.6
GND on Bottom Layer "GND" (solid, remove dead copper, shelved, pour order 46): 0.508,1.079 51.054,1.079 51.054,48.6 0.508,48.6
"BAT 5S" on Bottom Layer "BAT 5S" (solid, remove dead copper, shelved, pour order 44): 21.971,26.225 21.971,19.24 23.876,17.335 27.94,17.335 29.845,19.24 29.845,26.225
GND on Top Layer "Top Layer-GND" (solid, pour order 88): 0,25 0,0 48.5,0 48.5,25
GND on Top Layer "GND" (solid, remove dead copper, shelved, pour order 48): 0,48.6 51.562,48.6 51.562,0.571 0,0.571
GND on Top Layer "GND" (solid, remove dead copper, shelved, pour order 52): 0,48.6 51.562,48.6 51.562,0 0,0

## Keep-outs
Keep-Out Layer:
  the board outline again, w0.254

## Other copper
Top Layer:
  text "GND" at 5.3,21.4 h1.52

## Silkscreen, mask and mechanical layers (free items; w line width, h text height)
Top Overlay:
  text "VBAT" at 15.256,28.3 h1.52
  text "GND" at 9.256,28.175 h1.52
  text "M1" at 34.67,9.548 h1.52
Mechanical 1:
  lines w0.2: -0.1,0 ccw(c0,0) 0,-0.1 cw(c0,0) -0.1,0 ; -0.1,48.6 cw(c0,48.6) 0,48.7 ccw(c0,48.6) -0.1,48.6